# Altium PCB SLRC_2019_Robot_PCB_Main.PcbDoc
Units mil, origin at the board's own origin, x right, y up, seen from the top; angles counter-clockwise.
Board outline 7086.61 x 7086.61 mil, 2 copper layers (Top Layer, Bottom Layer); 32 components, 74 nets, 247 pads, 65 vias.
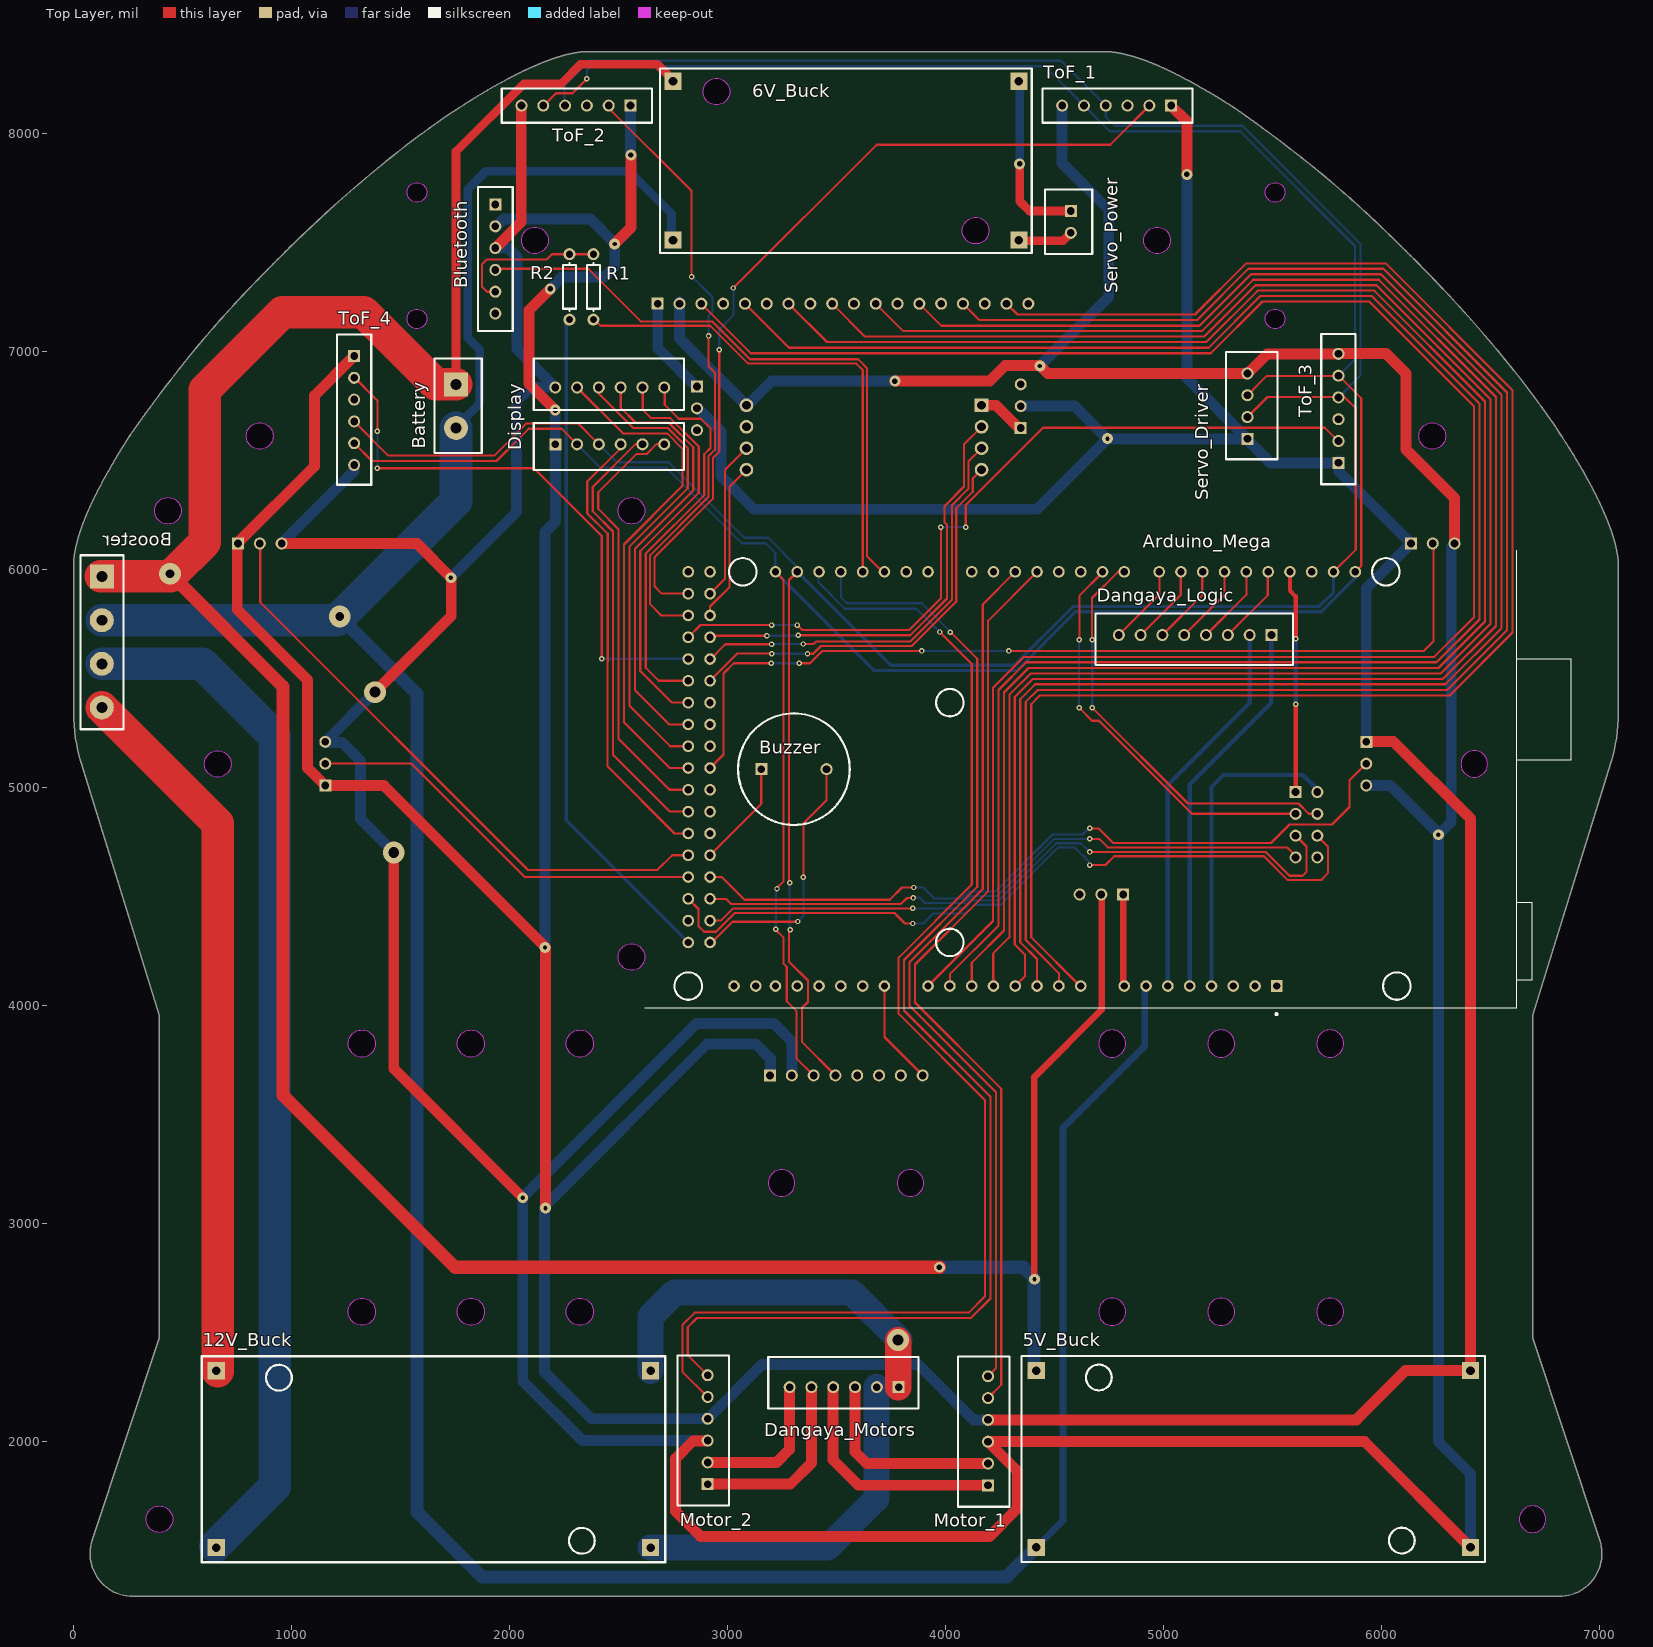
[diagram p0: Top Layer view]
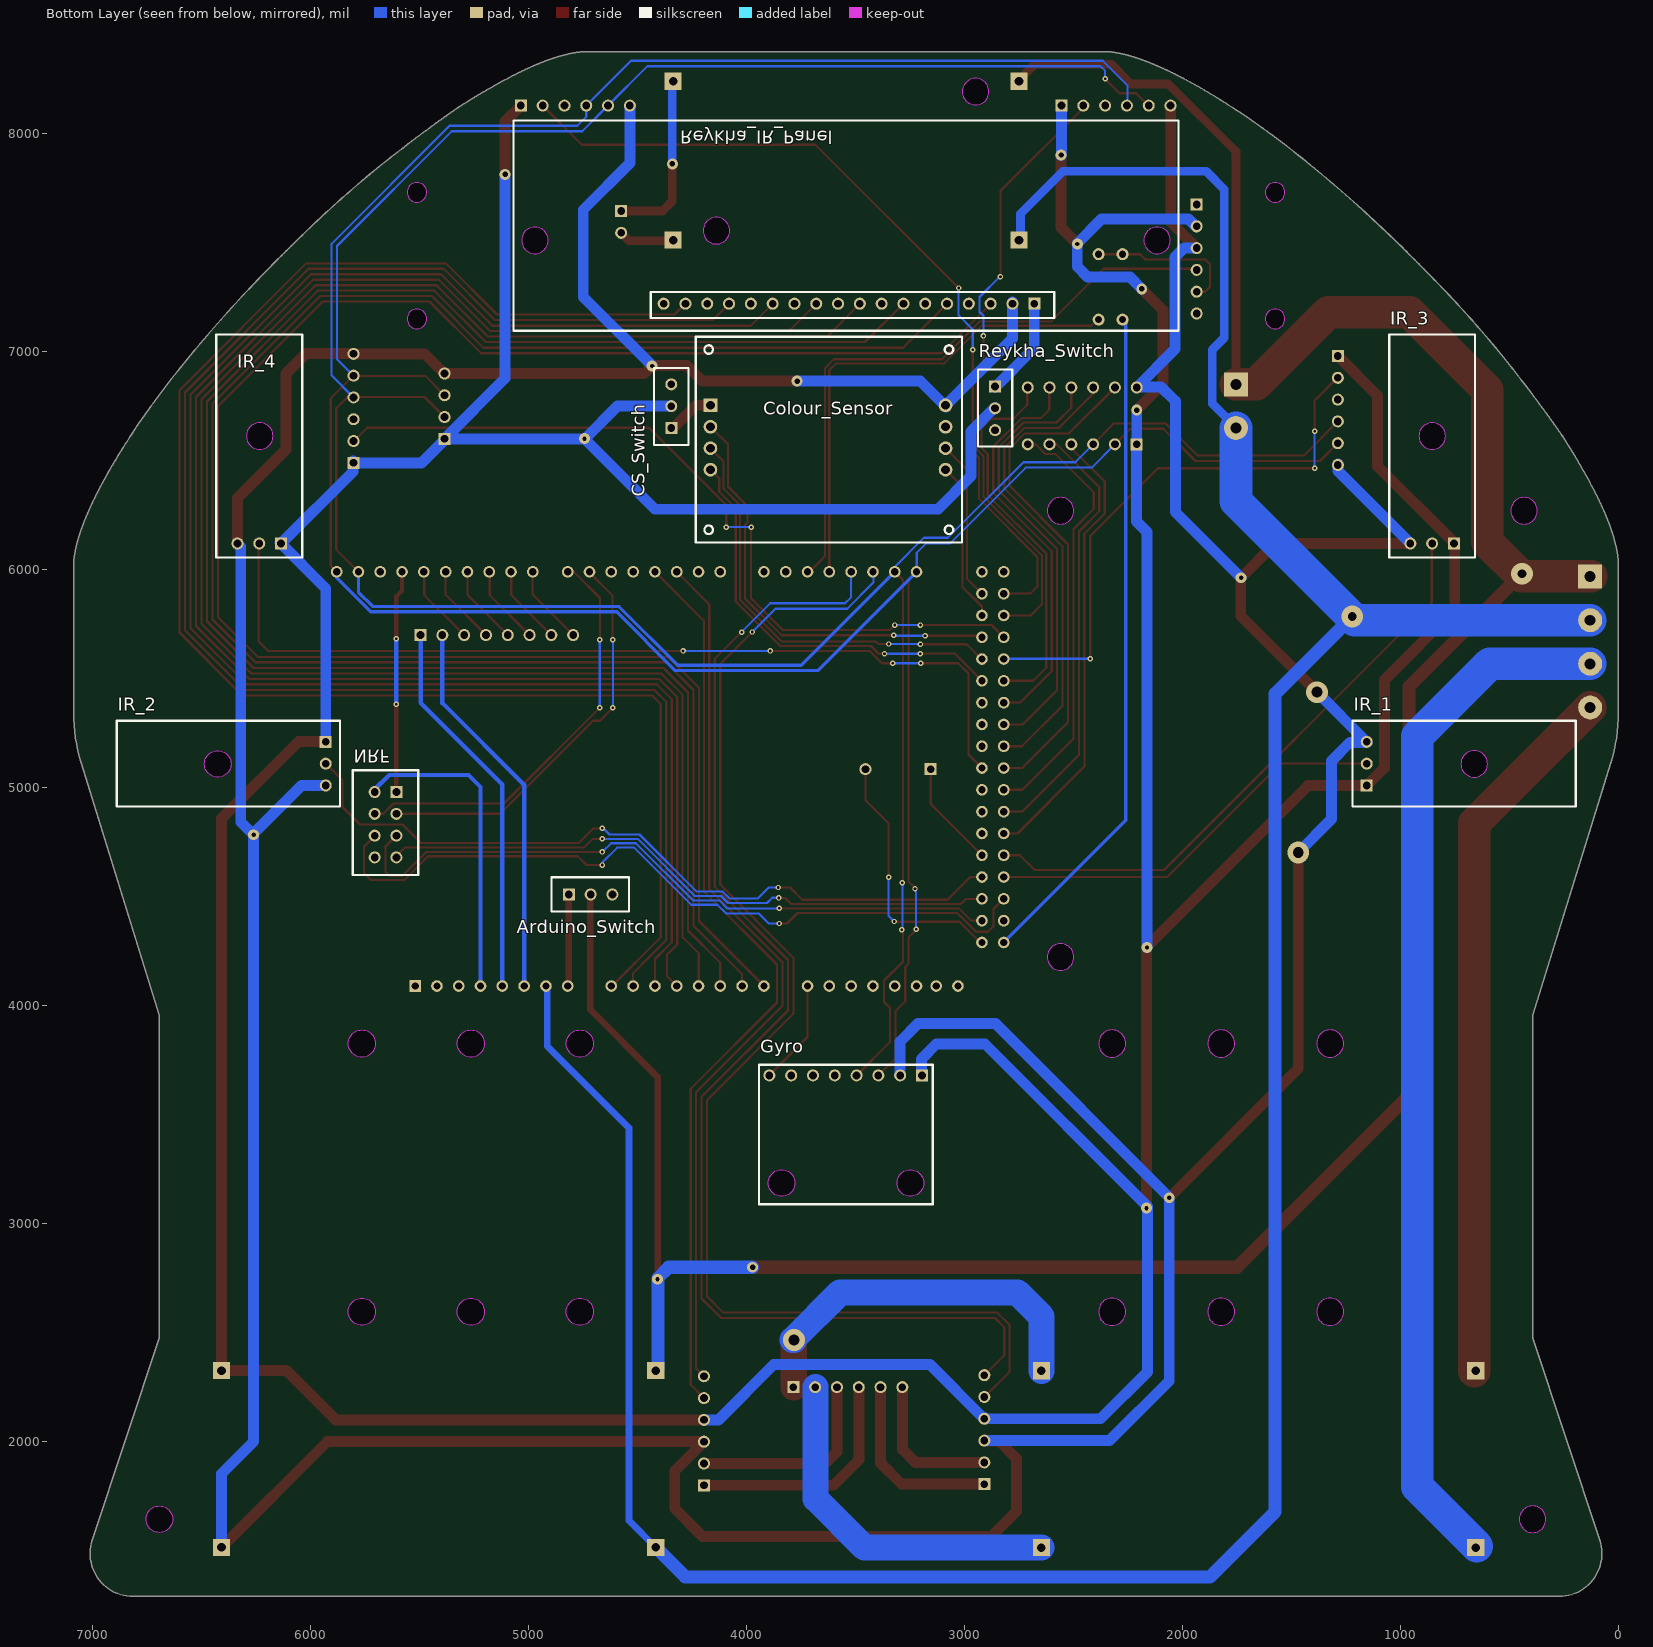
[diagram p1: Bottom Layer view, seen from below]

## Layer stack, top to bottom
Top Solder: solder mask 0.4, Solder Resist, Dk 3.5
Top Layer: signal copper 1.4
Dielectric 1: dielectric 12.6, FR-4, Dk 4.8
Bottom Layer: signal copper 1.4
Bottom Solder: solder mask 0.4, Solder Resist, Dk 3.5

## Board outline
1087 vertices, not listed, extent 0.25,1290 7086.86,8376.61
cut-out: 4702.02,2596.1 ccw(c4764.52,2596.1) 4764.52,2533.6 ccw(c4764.52,2596.1) 4827.02,2596.1 ccw(c4764.52,2596.1) 4764.52,2658.6 ccw(c4764.52,2596.1)
cut-out: 2948.87,8131.78 cw(c2948.87,8192.8) 2887.85,8192.8 cw(c2948.87,8192.8) 2948.87,8253.82 cw(c2948.87,8192.8) 3009.9,8192.8 cw(c2948.87,8192.8)
cut-out: 1575.05,7685.51 cw(c1575.05,7730.51) 1530.05,7730.51 cw(c1575.05,7730.51) 1575.05,7775.51 cw(c1575.05,7730.51) 1620.05,7730.51 cw(c1575.05,7730.51)
cut-out: 1575.05,7105.51 cw(c1575.05,7150.51) 1530.05,7150.51 cw(c1575.05,7150.51) 1575.05,7195.51 cw(c1575.05,7150.51) 1620.05,7150.51 cw(c1575.05,7150.51)
cut-out: 2116.39,7449.45 cw(c2116.39,7510.47) 2055.37,7510.47 cw(c2116.39,7510.47) 2116.39,7571.5 cw(c2116.39,7510.47) 2177.42,7510.47 cw(c2116.39,7510.47)
cut-out: 4138.04,7493.99 cw(c4138.04,7555.01) 4077.01,7555.01 cw(c4138.04,7555.01) 4138.04,7616.03 cw(c4138.04,7555.01) 4199.06,7555.01 cw(c4138.04,7555.01)
cut-out: 5512.06,7105.51 cw(c5512.06,7150.51) 5467.06,7150.51 cw(c5512.06,7150.51) 5512.06,7195.51 cw(c5512.06,7150.51) 5557.06,7150.51 cw(c5512.06,7150.51)
cut-out: 5512.06,7685.51 cw(c5512.06,7730.51) 5467.06,7730.51 cw(c5512.06,7730.51) 5512.06,7775.51 cw(c5512.06,7730.51) 5557.06,7730.51 cw(c5512.06,7730.51)
cut-out: 4970.72,7449.45 cw(c4970.72,7510.47) 4909.7,7510.47 cw(c4970.72,7510.47) 4970.72,7571.5 cw(c4970.72,7510.47) 5031.75,7510.47 cw(c4970.72,7510.47)
cut-out: 6232.53,6551.81 cw(c6232.53,6612.83) 6171.51,6612.83 cw(c6232.53,6612.83) 6232.53,6673.86 cw(c6232.53,6612.83) 6293.56,6612.83 cw(c6232.53,6612.83)
cut-out: 6364.42,5108.9 ccw(c6425.45,5108.9) 6425.45,5047.87 ccw(c6425.45,5108.9) 6486.47,5108.9 ccw(c6425.45,5108.9) 6425.45,5169.92 ccw(c6425.45,5108.9)
cut-out: 6632.14,1644.33 ccw(c6693.16,1644.33) 6693.16,1583.31 ccw(c6693.16,1644.33) 6754.19,1644.33 ccw(c6693.16,1644.33) 6693.16,1705.35 ccw(c6693.16,1644.33)
cut-out: 5702.02,2596.1 ccw(c5764.52,2596.1) 5764.52,2533.6 ccw(c5764.52,2596.1) 5827.02,2596.1 ccw(c5764.52,2596.1) 5764.52,2658.6 ccw(c5764.52,2596.1)
cut-out: 5202.02,2596.1 ccw(c5264.52,2596.1) 5264.52,2533.6 ccw(c5264.52,2596.1) 5327.02,2596.1 ccw(c5264.52,2596.1) 5264.52,2658.6 ccw(c5264.52,2596.1)
cut-out: 5702.02,3826.1 ccw(c5764.52,3826.1) 5764.52,3763.6 ccw(c5764.52,3826.1) 5827.02,3826.1 ccw(c5764.52,3826.1) 5764.52,3888.6 ccw(c5764.52,3826.1)
cut-out: 5202.02,3826.1 ccw(c5264.52,3826.1) 5264.52,3763.6 ccw(c5264.52,3826.1) 5327.02,3826.1 ccw(c5264.52,3826.1) 5264.52,3888.6 ccw(c5264.52,3826.1)
cut-out: 4702.02,3826.1 ccw(c4764.52,3826.1) 4764.52,3763.6 ccw(c4764.52,3826.1) 4827.02,3826.1 ccw(c4764.52,3826.1) 4764.52,3888.6 ccw(c4764.52,3826.1)
cut-out: 2559.31,6209.29 cw(c2559.31,6270.31) 2498.28,6270.31 cw(c2559.31,6270.31) 2559.31,6331.34 cw(c2559.31,6270.31) 2620.33,6270.31 cw(c2559.31,6270.31)
cut-out: 854.58,6551.81 cw(c854.58,6612.83) 793.56,6612.83 cw(c854.58,6612.83) 854.58,6673.86 cw(c854.58,6612.83) 915.6,6612.83 cw(c854.58,6612.83)
cut-out: 433.32,6209.29 cw(c433.32,6270.31) 372.3,6270.31 cw(c433.32,6270.31) 433.32,6331.34 cw(c433.32,6270.31) 494.34,6270.31 cw(c433.32,6270.31)
cut-out: 661.67,5047.87 cw(c661.67,5108.9) 600.64,5108.9 cw(c661.67,5108.9) 661.67,5169.92 cw(c661.67,5108.9) 722.69,5108.9 cw(c661.67,5108.9)
cut-out: 2559.31,4162.05 cw(c2559.31,4223.07) 2498.28,4223.07 cw(c2559.31,4223.07) 2559.31,4284.09 cw(c2559.31,4223.07) 2620.33,4223.07 cw(c2559.31,4223.07)
cut-out: 1322.59,3763.6 cw(c1322.59,3826.1) 1260.09,3826.1 cw(c1322.59,3826.1) 1322.59,3888.6 cw(c1322.59,3826.1) 1385.09,3826.1 cw(c1322.59,3826.1)
cut-out: 1822.59,3763.6 cw(c1822.59,3826.1) 1760.09,3826.1 cw(c1822.59,3826.1) 1822.59,3888.6 cw(c1822.59,3826.1) 1885.09,3826.1 cw(c1822.59,3826.1)
cut-out: 2322.59,3763.6 cw(c2322.59,3826.1) 2260.09,3826.1 cw(c2322.59,3826.1) 2322.59,3888.6 cw(c2322.59,3826.1) 2385.09,3826.1 cw(c2322.59,3826.1)
cut-out: 3777.81,3186.65 ccw(c3838.83,3186.65) 3838.83,3125.63 ccw(c3838.83,3186.65) 3899.86,3186.65 ccw(c3838.83,3186.65) 3838.83,3247.68 ccw(c3838.83,3186.65)
cut-out: 3187.26,3186.65 ccw(c3248.28,3186.65) 3248.28,3125.63 ccw(c3248.28,3186.65) 3309.31,3186.65 ccw(c3248.28,3186.65) 3248.28,3247.68 ccw(c3248.28,3186.65)
cut-out: 2322.59,2533.6 cw(c2322.59,2596.1) 2260.09,2596.1 cw(c2322.59,2596.1) 2322.59,2658.6 cw(c2322.59,2596.1) 2385.09,2596.1 cw(c2322.59,2596.1)
cut-out: 1822.59,2533.6 cw(c1822.59,2596.1) 1760.09,2596.1 cw(c1822.59,2596.1) 1822.59,2658.6 cw(c1822.59,2596.1) 1885.09,2596.1 cw(c1822.59,2596.1)
cut-out: 1322.59,2533.6 cw(c1322.59,2596.1) 1260.09,2596.1 cw(c1322.59,2596.1) 1322.59,2658.6 cw(c1322.59,2596.1) 1385.09,2596.1 cw(c1322.59,2596.1)
cut-out: 393.95,1583.31 cw(c393.95,1644.33) 332.93,1644.33 cw(c393.95,1644.33) 393.95,1705.35 cw(c393.95,1644.33) 454.97,1644.33 cw(c393.95,1644.33)

## Design rules (kind name [scope] priority, off if disabled: settings)
BoardOutlineClearance [All] p1: gap=10 ignorepadtopadclearanceinfootprint=FALSE
Clearance CopperRule [InNamedPolygon('BATTERY_-_L02_P010')] p1: gap=20 ignorepadtopadclearanceinfootprint=FALSE
Clearance Clearance_2 [InNamedPolygon('BATTERY_-_L02_P004')] p2: gap=10 ignorepadtopadclearanceinfootprint=FALSE except(0: Arc-Hole Track-Hole SMDPad-Hole THPad-Hole Via-Hole Fill-Hole Poly-Hole Region-Hole Text-Hole)
Clearance Clearance_1 [InNamedPolygon('BATTERY_-_L02_P004')] p3: gap=10 ignorepadtopadclearanceinfootprint=FALSE except(0: Arc-Hole Track-Hole SMDPad-Hole THPad-Hole Via-Hole Fill-Hole Poly-Hole Region-Hole Text-Hole)
Clearance [All] p4: gap=10 ignorepadtopadclearanceinfootprint=FALSE
DiffPairsRouting [All] p1: maxlimit=10 minlimit=10 mostfreqgap=10 toplayer_minwidth=15 toplayer_maxwidth=15 toplayer_prefwidth=15 bottomlayer_minwidth=15 bottomlayer_maxwidth=15 bottomlayer_prefwidth=15 maxuncoupledlength=500
HoleSize [All] p1: absolutevalues=TRUE maxlimit=100 minlimit=10 maxpercent=80.000 minpercent=20.000
MinimumAnnularRing [All] p1: minimumring=3
PolygonConnect [All] p1: connectstyle=Relief reliefconductorwidth=10 reliefentries=4 polygonreliefangle="90 Angle" airgapwidth=10
RoutingVias [All] p1: holewidth=25 width=50 viastyle="Through Hole" minholewidth=10 minwidth=20 maxholewidth=50 maxwidth=100
SilkToSolderMaskClearance [IsPad] p1: minsilkscreentomaskgap=8 clearancetoexposedcopper=TRUE
SolderMaskExpansion [All] p1: expansion=4
Width [All] p1: maxlimit=150 minlimit=10 preferedwidth=30
27 further rules are at their usual default settings.

## Classes and differential pairs
differential pair Motor_2_Enc: +Motor_2_Enc_P -Motor_2_Enc_N
differential pair Motor_1_Enc: +Motor_1_Enc_P -Motor_1_Enc_N
differential pair SCL_SDA: +SCL_SDA_P -SCL_SDA_N
differential pair Raykha_S78: +Raykha_S78_P -Raykha_S78_N
differential pair Raykha_S56: +Raykha_S56_P -Raykha_S56_N
differential pair Raykha_S34: +Raykha_S34_P -Raykha_S34_N
differential pair Raykha_S12: +Raykha_S12_P -Raykha_S12_N

## Components (designator, comment, footprint, x,y, rotation, side; value= is the part's Value field where it differs from the comment)
5V_Buck "Buck_XL4015" Buck_LM4015 4349.07,2392.93 r0 top locked
6V_Buck "Buck_LM2596" Buck_LM2596 2690.94,8299.06 r0 top locked
12V_Buck "Buck_XL4015" Buck_LM4015 588.07,2391.93 r0 top locked
Arduino_Mega "ARDUINO_MEGA2560_REV3_-_RETAIL" *ARDUINO_MEGA2560_REV3_-_RETAIL_ARDUINO_MEGA2560_REV3_-_RETAIL(Primary) 4620,5040 r90 top locked
Arduino_Switch "Switch" Switch 4815,4510 r180 bottom locked
Battery "Battery_Connector" Battery_Connector 1755,6850 r90 top locked
Bluetooth "Bluetooth_Module_HC-05" Bluetooth_Module_HC-05 1935,7675 r90 top locked
Booster "DC_DC_Boost_Converter" DC_DC_Boost_Converter 130,5968 r0 top
Buzzer "Buzzer" Buzzer 3155,5085 r180 top locked
Colour_Sensor "Colour_Sensor_TCS3200" Colour_Sensor_TCS3200 4232.48,7068.7 r180 bottom locked
CS_Switch "Switch" Switch 4345,6650 r90 bottom locked (schematic designator Colour_Sensor_Switch)
Dangaya_Logic "Dangaya_Logic_JST" Dangaya_Logic_JST 5495,5700 r270 top locked
Dangaya_Motors "Dangaya_Motors_JST" Dangaya_Motors_JST 3285,2250 r90 top locked
Display "Button_Panel_LED_and_OLED" Button_Panel_LED_and_OLED 2210,6575 r180 top locked
Gyro "Gyro_MPU6050" Gyro_MPU6050 3195,3680 r180 bottom locked
IR_1 "Single_Line_Sensor_TCRT5000" Single_Line_Sensor_TCRT5000 196.34,4913.15 r0 bottom locked
IR_2 "Single_Line_Sensor_TCRT5000" Single_Line_Sensor_TCRT5000 6888.66,5306.85 r180 bottom locked
IR_3 "Single_Line_Sensor_TCRT5000" Single_Line_Sensor_TCRT5000 658.15,7078.66 r270 bottom locked
IR_4 "Single_Line_Sensor_TCRT5000" Single_Line_Sensor_TCRT5000 6038.15,7078.66 r270 bottom locked
Motor_1 "Pololu_Gear_Motor" Pololu_Gear_Motor 4195,1800 r180 top locked
Motor_2 "Pololu_Gear_Motor" Pololu_Gear_Motor 2909,1805 r180 top locked
NRF "NRF_24L01_Module" NRF_24L01 5605.75,4980 r0 bottom locked
R1 "Res1" AXIAL-0.3 2385,7297 r270 top locked value=1K
R2 "Res1" AXIAL-0.3 2275,7297 r90 top locked value=1K
Reykha_IR_Panel "Reykha_IR_Panel" Reykha_IR_Panel 5068.98,8060.55 r180 bottom locked
Reykha_Switch "Switch" Switch 2860,6840 r270 bottom locked
Servo_Driver "Servo_Driver" Servo_Driver 5385,6900 r270 top locked
Servo_Power "Servo_Power" Servo_Power 4575,7645 r90 top locked
ToF_1 "ToF_VL53L0" ToF_VL53L0 5035,8128.74 r180 top locked
ToF_2 "ToF_VL53L0" ToF_VL53L0 2555,8128.74 r180 top locked
ToF_3 "ToF_VL53L0" ToF_VL53L0 5802.52,6490 r90 top locked
ToF_4 "ToF_VL53L0" ToF_VL53L0 1287.48,6980 r270 top locked

## Footprints (in the part's own frame and the unit in brackets; to place one, negate y for a bottom-side part, rotate by r counter-clockwise, add the part's x,y. Pads: shape width x height; smd on the part's side, far side on the other; paste and mask are expansions set on the pad)
*ARDUINO_MEGA2560_REV3_-_RETAIL_ARDUINO_MEGA2560_REV3_-_RETAIL(Primary) [mm]
  round 1.358 hole 0.85: 0(24.13,12.7) 1(24.13,10.16) 2(24.13,7.62) 3(24.13,5.08) 3V3(-24.13,-15.24) 4(24.13,2.54) 5(24.13,0) 5V_1(-24.13,-12.7) 5V_2(24.13,43.18) 5V_3(24.13,45.72) 6(24.13,-2.54) 7(24.13,-5.08) 8(24.13,-9.144) 9(24.13,-11.684) 10(24.13,-14.224) 11(24.13,-16.764) 12(24.13,-19.304) 13(24.13,-21.844) 14(24.13,17.78) 15(24.13,20.32) 16(24.13,22.86) 17(24.13,25.4) 18(24.13,27.94) 19(24.13,30.48) 20(24.13,33.02) 21(24.13,35.56) 22(21.59,43.18) 23(21.59,45.72) 24(19.05,43.18) 25(19.05,45.72) 26(16.51,43.18) 27(16.51,45.72) 28(13.97,43.18) 29(13.97,45.72) 30(11.43,43.18) 31(11.43,45.72) 32(8.89,43.18) 33(8.89,45.72) 34(6.35,43.18) 35(6.35,45.72) 36(3.81,43.18) 37(3.81,45.72) 38(1.27,43.18) 39(1.27,45.72) 40(-1.27,43.18) 41(-1.27,45.72) 42(-3.81,43.18) 43(-3.81,45.72) 44(-6.35,43.18) 45(-6.35,45.72) 46(-8.89,43.18) 47(-8.89,45.72) 48(-11.43,43.18) 49(-11.43,45.72) 50(-13.97,43.18) 51(-13.97,45.72) 52(-16.51,43.18) 53(-16.51,45.72) AD0(-24.13,0) AD1(-24.13,2.54) AD2(-24.13,5.08) AD3(-24.13,7.62) AD4(-24.13,10.16) AD5(-24.13,12.7) AD6(-24.13,15.24) AD7(-24.13,17.78) AD8(-24.13,22.86) AD9(-24.13,25.4) AD10(-24.13,27.94) AD11(-24.13,30.48) AD12(-24.13,33.02) AD13(-24.13,35.56) AD14(-24.13,37.846) AD15(-24.13,40.386) AREF(24.13,-26.924) GND1(-24.13,-10.16) GND2(-24.13,-7.62) GND3(24.13,-24.384) GND4(-19.05,43.18) GND5(-19.05,45.72) IOREF(-24.13,-20.32) RESET(-24.13,-17.78) SCL(24.13,-32.004) SDA(24.13,-29.464) VIN(-24.13,-5.08)
  rect 1.358x1.358 hole 0.85: NC(-24.13,-22.86)
  silkscreen extent -27.52,-57.15 26.67,50.8
AXIAL-0.3 [mm] "Axial Device, Thru-Hole; 2 Leads; 0.3 in Pin Spacing"
  round 1.4 hole 0.85: 1(-3.81,0) 2(3.81,0)
  silkscreen extent -2.77,-0.76 2.77,0.76
Battery_Connector [mil]
  rect 110x110 hole 50: 1(0,0)
  round 110 hole 50: 2(-200,0)
  silkscreen extent -315,-118 118,98
Bluetooth_Module_HC-05 [mm]
  rect 1.4x1.4 hole 0.9: 1(0,0)
  round 1.4 hole 0.9: 2(-2.54,0) 3(-5.08,0) 4(-7.62,0) 5(-10.16,0) 6(-12.7,0)
  silkscreen extent -14.73,-2.03 2.03,2.03
Buck_LM2596 [mm]
  rect 2x2 hole 1: 1(1.5,-1.5) 2(1.5,-20) 3(41.8,-1.5) 4(41.8,-20)
  silkscreen extent 0,-21.5 43.3,0
Buck_LM4015 [mm]
  rect 2x2 hole 1: 1(1.7,-1.7) 2(1.7,-22.3) 3(52.3,-1.7) 4(52.3,-22.3)
  silkscreen extent 0,-24 54,0
Button_Panel_LED_and_OLED [mm]
  rect 1.4x1.4 hole 0.9: 1(0,0)
  round 1.4 hole 0.9: 2(-2.54,0) 3(-5.08,0) 4(-7.62,0) 5(-10.16,0) 6(-12.7,0) 7(-12.7,-6.62) 8(-10.16,-6.62) 9(-7.62,-6.62) 10(-5.08,-6.62) 11(-2.54,-6.62) 12(0,-6.62)
  silkscreen extent -15,-10 2.5,3
Buzzer [mm]
  rect 1.4x1.4 hole 0.9: 1(0,0)
  round 1.4 hole 0.9: 2(-7.6,0)
  silkscreen extent -10.3,-6.5 2.7,6.5
Colour_Sensor_TCS3200 [mm]
  rect 1.6x1.6 hole 1.02: 1(1.7,-8)
  round 1.6 hole 1.02: 2(1.7,-10.5) 3(1.7,-13) 4(1.7,-15.5) 5(29.1,-8) 6(29.1,-10.5) 7(29.1,-13) 8(29.1,-15.5)
  silkscreen extent 0,-24 31,0
Dangaya_Logic_JST [mm]
  rect 1.4x1.4 hole 0.9: 1(0,0)
  round 1.4 hole 0.9: 2(0,-2.54) 3(0,-5.08) 4(0,-7.62) 5(0,-10.16) 6(0,-12.7) 7(0,-15.24) 8(0,-17.78)
  silkscreen extent -2.5,-20.5 3.5,2.5
Dangaya_Motors_JST [mm]
  round 1.4 hole 0.9: 1(0,0) 2(0,-2.54) 3(0,-5.08) 4(0,-7.62) 5(0,-10.16)
  rect 1.4x1.4 hole 0.9: 6(0,-12.7)
  silkscreen extent -2.5,-15 3.5,2.5
DC_DC_Boost_Converter [mil]
  rect 110x110 hole 50: 1(0,0)
  round 110 hole 50: 2(0,-200) 3(0,-400) 4(0,-600)
  silkscreen extent -98,-700 100,98
Gyro_MPU6050 [mm]
  rect 1.4x1.4 hole 0.9: 1(0,0)
  round 1.4 hole 0.9: 2(-2.54,0) 3(-5.08,0) 4(-7.62,0) 5(-10.16,0) 6(-12.7,0) 7(-15.24,0) 8(-17.78,0)
  silkscreen extent -19,-15 1.25,1.25
NRF_24L01 [mm]
  rect 1.4x1.4 hole 0.9: 1(0,0)
  round 1.4 hole 0.9: 2(2.54,0) 3(0,2.54) 4(2.54,2.54) 5(0,5.08) 6(2.54,5.08) 7(0,7.62) 8(2.54,7.62)
  silkscreen extent -2.54,-2.54 5.08,9.65
Pololu_Gear_Motor [mm]
  rect 1.4x1.4 hole 0.9: 1(0,0)
  round 1.4 hole 0.9: 2(0,-2.54) 3(0,-5.08) 4(0,-7.62) 5(0,-10.16) 6(0,-12.7)
  silkscreen extent -2.5,-15 3.5,2.5
Reykha_IR_Panel [mm]
  rect 1.4x1.4 hole 0.9: 1(60.68,-21.35)
  round 1.4 hole 0.9: 2(58.14,-21.35) 3(55.6,-21.35) 4(53.06,-21.35) 5(50.52,-21.35) 6(47.98,-21.35) 7(45.44,-21.35) 8(42.9,-21.35) 9(40.36,-21.35) 10(37.82,-21.35) 11(35.28,-21.35) 12(32.74,-21.35) 13(30.2,-21.35) 14(27.66,-21.35) 15(25.12,-21.35) 16(22.58,-21.35) 17(20.04,-21.35) 18(17.5,-21.35)
  silkscreen extent 0,-24.5 77.5,0
Servo_Driver [mm]
  round 1.4 hole 0.9: 1(0,0) 2(2.54,0) 3(5.08,0)
  rect 1.4x1.4 hole 0.9: 4(7.62,0)
  silkscreen extent -2.5,-2.5 10,3.5
Servo_Power [mm]
  rect 1.4x1.4 hole 0.9: 1(0,0)
  round 1.4 hole 0.9: 2(-2.54,0)
  silkscreen extent -5,-2.5 2.5,3
Single_Line_Sensor_TCRT5000 [mm]
  rect 1.4x1.4 hole 0.9: 1(24.35,-2.46)
  round 1.4 hole 0.9: 2(24.35,-5) 3(24.35,-7.54)
  silkscreen extent 0,-10 26,0
Switch [mm]
  rect 1.4x1.4 hole 0.9: 1(0,0)
  round 1.4 hole 0.9: 2(2.54,0) 3(5.08,0)
  silkscreen extent -2,-2 7,2
ToF_VL53L0 [mm]
  rect 1.4x1.4 hole 0.9: 1(0,0)
  round 1.4 hole 0.9: 2(2.54,0) 3(5.08,0) 4(7.62,0) 5(10.16,0) 6(12.7,0)
  silkscreen extent -2.5,-2 15,2

## Part data
Arduino_Mega: "Dev.kit: Arduino; SPI, TWI, UART; ICSP, USB B, pin strips, supply", Package=None, Availability=Unavailable, MF=Arduino, MP="ARDUINO MEGA2560 REV3 - RETAIL", Price=None, SnapEDA_Link=https://www.snapeda.com/parts/ARDUINO%20MEGA2560%20REV3%20-%20RETAIL/Arduino/view-part/?ref=snap
R1 R2: "Resistor", LatestRevisionDate=17-Jul-2002, LatestRevisionNote="Re-released for DXP Platform.", PackageDescription="Axial Device, Thru-Hole; 2 Leads; 0.3 in Pin Spacing", PackageReference=AXIAL-0.3, Published=8-Jun-2000, Publisher="Altium Limited"

## Via types
v1: diameter 25, hole 12, Top Layer to Bottom Layer, 44 vias
v2: diameter 50, hole 20, Top Layer to Bottom Layer, 9 vias
v3: diameter 50, hole 25, Top Layer to Bottom Layer, 7 vias
v4: diameter 100, hole 50, Top Layer to Bottom Layer, 3 vias
v5: diameter 100, hole 40, Top Layer to Bottom Layer, 2 vias

## Nets (pads, with @x,y where several pads share a name; then routed paths per layer and width w, separated by ;. In a path a pad name is that pad's centre, name@x,y a point inside that pad or via, vN(x,y) a via of type N, cw(c..) or ccw(c..) an arc to the next point about the centre after c; other vN are vias at no path point)
Arduino_5V_Out: Arduino_Mega.5V_1 Dangaya_Logic.1 | length 1765.3
  Bottom Layer w20: Arduino_Mega.5V_1 5120,5015 5495,5390 Dangaya_Logic.1
Arduino_GND_Out: Arduino_Mega.GND1 Dangaya_Logic.2 | length 1768.3
  Bottom Layer w10: Arduino_Mega.GND1@5020,4087 Arduino_Mega.GND1
  Bottom Layer w20: Arduino_Mega.GND1 5020,5013 5395,5388 Dangaya_Logic.2
Arduino_GND_Out4: Arduino_Mega.GND4 Buzzer.2 | length 1184
  Top Layer w10: Arduino_Mega.GND4 2928,4290 3023,4385 v1@3323,4385 ; v1(3348,4589) 3348,4836 3454,4942 3454,5072 Buzzer.2@3455,5073
  Bottom Layer w10: v1(3323,4386) 3348,4411 v1(3348,4589)
Arduino_GND_Out5: Arduino_Mega.GND5 R2.1 | length 3096.2
  Bottom Layer w15: R2.1@2275,7148 2260,7133 2260,4850 Arduino_Mega.GND5
Arduino_V_In: Arduino_Mega.VIN Arduino_Switch.1 | length 420.7
  Top Layer w30: Arduino_Switch.1 4815,4095 Arduino_Mega.VIN@4819,4091
Battery_+: 5V_Buck.1 6V_Buck.1 Arduino_Switch.2 Battery.1 Booster.1 | length 15252.8
  Top Layer w30: v2(4408,2745) 4408,3673 4716,3981 ; 4716,3981 4716,4513 4716,3981
  Top Layer w40: Battery.1 1755,7918 2065,8228 2236,8228 2326,8318 2678,8318 ; 2678,8318 2756,8240 2678,8318
  Top Layer w60: v5(443,5981) 450,5974 961,5463 961,3589 1750,2800 v3(3972,2800)
  Top Layer w150: Battery.1 1662,6850 1331,7181 959,7181 602,6824 602,6126 ; v5@446,5970 126,5970 v5@446,5970 ; v5@446,5970 v5@450,5974 ; v5@446,5970 v5@450,5974 ; v5@450,5974 602,6126 ; v5@450,5974 602,6126
  Bottom Layer w60: v3(3972,2800) 4357,2800 v2@4406,2751 ; v2@4406,2751 4406,2335 v2@4406,2751
Battery_-: 5V_Buck.2 6V_Buck.2 Arduino_Mega.GND2 Battery.2 Booster.2 | length 15814.5
  Bottom Layer w30: 5V_Buck.2 4539,1637.98 4539,3439 4913,3813 ; 4913,3813 4913,4093 4913,3813
  Bottom Layer w40: Battery.2@1755,6653.15 1864,6762.15 1864,7008 1808,7064 1808,7744 1891,7827 2548,7827 2743,7632 6V_Buck.2@2743,7515
  Bottom Layer w60: v5(1221,5785) 1223.5,5782.5 1575,5431 1575,1678 1873,1380 4281,1380 ; 4281,1380 5V_Buck.2 4281,1380
  Bottom Layer w150: Booster.2 v5@1209,5768 ; Battery.2 1755,6314 ; v5@1209,5768 v5@1223.5,5782.5 ; v5@1209,5768 v5@1223.5,5782.5 ; v5@1223.5,5782.5 1755,6314 ; v5@1223.5,5782.5 1755,6314
Bluetooth_Rx: Arduino_Mega.16 Bluetooth.4 | length 5038.5
  Top Layer w10: Arduino_Mega.16 3711,5990 3640,6061 3640,6924.28 3599.28,6965 3103.18,6965 2929.18,7139 2602,7139 2361,7380 ; Bluetooth.4@1928,7380 Bluetooth.4@1935,7380 ; Bluetooth.4@1928,7380 Bluetooth.4@1935,7380 ; Bluetooth.4@1928,7380 Bluetooth.4@1935,7380 ; Bluetooth.4@1928,7380 2361,7380 ; Bluetooth.4@1928,7380 2361,7380 ; Bluetooth.4@1928,7380 Bluetooth.4@1935,7380 ; Bluetooth.4@1935,7380 2361,7380 ; Bluetooth.4@1935,7380 2361,7380 ; Bluetooth.4@1935,7380 2361,7380 ; Bluetooth.4@1935,7380 2361,7380
Bluetooth_Tx: Arduino_Mega.17 R1.2 | length 2483.6
  Top Layer w10: Arduino_Mega.17 3620,6916 3591,6945 3094.9,6945 2920.9,7119 2418,7119 ; R1.2@2386,7151 2418,7119 ; R1.2@2386,7151 2418,7119 ; R1.2@2386,7151 R1.2@2387.5,7149.5 ; R1.2@2386,7151 R1.2@2387.5,7149.5 ; R1.2@2386,7151 R1.2@2387.5,7149.5 ; R1.2@2386,7151 R1.2@2387.5,7149.5 ; R1.2@2387.5,7149.5 2418,7119 ; R1.2@2387.5,7149.5 2418,7119 ; R1.2@2387.5,7149.5 2418,7119 ; R1.2@2387.5,7149.5 2418,7119
Buck_5V_Out_GND: 5V_Buck.4 Bluetooth.3 Colour_Sensor.5 Display.12 Gyro.2 IR_1.3 IR_2.3 IR_3.3 IR_4.3 Motor_1.3 Motor_2.3 Reykha_IR_Panel.2 Servo_Driver.1 ToF_1.6 ToF_2.6 ToF_3.6 ToF_4.6 | length 27114.4
  Top Layer w10: ToF_3.6@5802.52,6988 ToF_3.6@5805,6988
  Top Layer w50: IR_3.3@952,6120 IR_3.3 1575,6120 1733,5962 1733,5788 v4(1383,5438) ; v4(1469,4703) 1469,3711 v2(2061,3119) ; Bluetooth.3 2054,7594 ToF_2.6@2054,8132 ; Motor_2.3@2908,2004 2843,2004 2761,1922 2761,1681 2877,1565 4201,1565 4329,1693 4329,1866 Motor_1.3 5923.1,2000 5V_Buck.4 ; v3(3768,6865) 4203,6865 4274,6936 4433,6936 4469,6900 Servo_Driver.1 ; Servo_Driver.1@5384,6898 5476,6990 ToF_3.6 ; ToF_3.6@5802,6992 6020,6992 6113,6899 6113,6551 6335,6329 IR_4.3
  Bottom Layer w50: IR_3.3 1287,6452 ToF_4.6@1287,6484 ; IR_1.3@1153,5208 1231,5208 1316,5123 1316,4856 v4(1469,4703) ; IR_1.3 v4(1383,5438) ; v2(1731,5963) 2033,6265 2033,6773 2098,6838 Display.12@2207,6838 ; Bluetooth.3@1936,7475 1993,7475 2034,7434 2034,7011.63 Display.12 ; Reykha_IR_Panel.2@2780,7227 Reykha_IR_Panel.2 2780,7060.55 Colour_Sensor.5 ; Motor_2.3 2334.58,2005 2061,2278.58 v2(2061,3119) 2061,3120.42 2858.29,3917.71 3213.71,3917.71 3295,3836.42 Gyro.2 ; Colour_Sensor.5@3084,6746 3203,6865 v3(3768,6865) ; v2@4434,6936 4749,7251 4749,7651 4535,7865 ToF_1.6 ; IR_2.3@5932,5010 6041,5010 6261,4790 v2(6261,4784) ; IR_4.3@6336,6121 IR_4.3 6320,6105 6320,4843 v2(6261,4784) ; 5V_Buck.4 6408.13,1852.87 6261,2000 v2(6261,4784)
  other v2: 4433,6934
Buck_5V_Out_Vcc: 5V_Buck.3 Bluetooth.2 CS_Switch.2 Display.1 Gyro.1 IR_1.1 IR_2.1 IR_3.1 IR_4.1 Motor_1.4 Motor_2.4 Reykha_Switch.2 Servo_Driver.4 ToF_1.1 ToF_2.1 ToF_3.1 ToF_4.1 | length 26844.6
  Top Layer w10: ToF_3.1@5802.52,6491 ToF_3.1@5803,6491
  Top Layer w50: IR_3.1@751,6124 751,5817 1074,5494 1074,5091 IR_1.1 ; IR_3.1 755,6124 1105,6474 1105,6798 ToF_4.1@1289,6982 ; IR_1.1@1151,5009 1424,5009 2165,4268 v2(2165,3071) ; v3(2187,7288) 2089,7190 2089,6853 v3(2210,6732) ; v2(2482,7494) 2557,7569 v3(2557,7902) ; Motor_1.4 5885,2100 5895,2110 ; ToF_1.1@5033,8129 5107,8055 v3(5107,7813) ; 5890,2106 6110,2326 5V_Buck.3 6408.13,4857.87 6054,5212 IR_2.1@5926,5212
  Bottom Layer w50: Bluetooth.2@1936,7571 1973,7608 2371,7608 2483,7496 2483,7390 2435,7342 2241,7342 v3(2187,7288) ; v2(2163,4267) 2163,6173 2211,6221 Display.1@2211,6577 ; Display.1 v3(2210,6732) ; ToF_2.1 2555,7902 v3@2558,7899 ; Reykha_Switch.2@2861,6743 2970,6634 2970,6429 3122,6277 4419,6277 v2@4742,6600 ; Motor_2.4@2908,2110 2915,2110 3159,2354 3875,2354 4129,2100 Motor_1.4 ; Motor_2.4 2376,2105 2161,2320 2161,3079 2907,3825 3128,3825 3198,3755 3198,3683 Gyro.1 ; CS_Switch.2 4592,6750 v2@4742,6600 ; v2(4743,6601) v2@4742,6600 ; v3(5107,7813) 5107,6878 Servo_Driver.4 Servo_Driver.4@5380,6600 ; ToF_3.1 5490,6490 Servo_Driver.4@5380,6600 ; ToF_3.1@5804,6498 5804,6451 IR_4.1 ; IR_2.1 5930,5914 IR_4.1@6140,6124 ; v2@4742,6600 Servo_Driver.4@5380,6600
Buck_6V_Out_GND: 6V_Buck.4 Servo_Power.2 | length 862.3
  Top Layer w40: 6V_Buck.4@4336.61,7509 4539,7509 ; Servo_Power.2 4539,7509 ; 6V_Buck.4@4336,7509 4539,7509 ; 6V_Buck.4@4336,7509 4539,7509 ; 6V_Buck.4@4336,7509 4539,7509
Buck_6V_Out_Vcc: 6V_Buck.3 Servo_Power.1 | length 806.3
  Top Layer w40: v3@4339,7863 4340,7862 v3(4340,7861) 4340,7690 4385,7645 Servo_Power.1
  Bottom Layer w40: 6V_Buck.3@4337,8239 4340,8236 v3(4340,7861)
Buck_12V_In_GND: 12V_Buck.2 Booster.3 | length 4758.6
  Bottom Layer w150: Booster.3 591,5568 923,5236 923,1794 12V_Buck.2@650,1521
Buck_12V_In_Vcc: 12V_Buck.1 Booster.4 | length 10802.4
  Top Layer w150: Booster.4 662,4836 ; 12V_Buck.1@662,2325 662,4836 ; 12V_Buck.1@662,2323 662,4836 ; 12V_Buck.1@662,2323 662,4836 ; 12V_Buck.1@662,2323 662,4836
Buck_12V_Out_GND: 12V_Buck.4 Dangaya_Motors.5 | length 2664.7
  Bottom Layer w120: 12V_Buck.4 3458.98,1513.98 3683,1738 ; 3683,1738 Dangaya_Motors.5@3683,2250 ; 3683,1738 Dangaya_Motors.5@3683,2250 ; 3683,1738 Dangaya_Motors.5@3683,2250
Buck_12V_Out_Vcc: 12V_Buck.3 Dangaya_Motors.6 | length 2781.5
  Top Layer w120: v4(3782,2467) 3782,2459 v4@3783,2458 ; Dangaya_Motors.6@3782.56,2248 Dangaya_Motors.6@3783,2248.44 ; Dangaya_Motors.6@3783,2248.44 v4@3783,2458 ; Dangaya_Motors.6@3783,2248.44 v4@3783,2458 ; Dangaya_Motors.6@3783,2248.44 v4@3783,2458
  Bottom Layer w120: 12V_Buck.3 2647.13,2574.13 2757,2684 3571,2684 ; v4(3782,2467) 3787,2467 v4@3787.5,2467.5 ; 3571,2684 v4@3787.5,2467.5 ; 3571,2684 v4@3787.5,2467.5 ; 3571,2684 v4@3787.5,2467.5
Button_1: Arduino_Mega.41 Display.6 | length 1980.6
  Top Layer w10: Display.6 2673.72,6575 2628.66,6529.94 2581.94,6529.94 2407,6355 2407,6278.71 2500,6185.71 2500,5224 2734,4990 Arduino_Mega.41
Button_2: Arduino_Mega.43 Display.5 | length 2029.1
  Top Layer w10: Display.5 2577.5,6575 2382,6379.5 2382,6268.36 2475,6175.36 2475,5151 2736,4890 Arduino_Mega.43
Button_3: Arduino_Mega.45 Display.4 | length 2095.5
  Top Layer w10: Display.4 2510,6556.99 2357,6403.99 2357,6258 2450.5,6164.5 2450.5,5579.61 2450,5579.11 2450,5097 2757,4790 Arduino_Mega.45
  Bottom Layer w10: Display.4@2510,6556.99 Display.4
Buzzer_+: Arduino_Mega.46 Buzzer.1 | length 503.3
  Top Layer w10: Arduino_Mega.46 3155,4925 Buzzer.1 Buzzer.1@3155,5096
Colour_Sensor_Out: Arduino_Mega.26 Colour_Sensor.2 | length 2022.3
  Top Layer w10: Arduino_Mega.26 2927,5697 v1(3181,5697) ; v1(3325,5699) 3838,5699 4007,5868 4007,6204 4006.5,6204.5 4006.5,6206.39 3996.95,6215.95 ; 3996,6216.89 3996,6292 4085,6381 4085,6574.76 Colour_Sensor.2
  Bottom Layer w10: v1(3181,5697) 3321,5697 3322,5696 v1(3325,5699)
Colour_Sensor_S0: Arduino_Mega.24 Colour_Sensor.8 | length 737.6
  Top Layer w10: Arduino_Mega.24 2920,5830.98 3009,5919.98 3009,6380.65 Colour_Sensor.8
Colour_Sensor_S1: Arduino_Mega.22 Colour_Sensor.7 | length 736
  Top Layer w10: Arduino_Mega.22 2989,5959 2989,6459.08 Colour_Sensor.7
Colour_Sensor_S2: Arduino_Mega.28 Colour_Sensor.3 | length 1973.3
  Top Layer w10: Arduino_Mega.28 2923,5590 2988,5655 2991,5658 v1(3202,5658) ; v1(3347,5659) 3395,5659 3406,5670 3837.28,5670 4029.5,5862.22 4029.5,6295.86 4105,6371.36 4105,6496.34 Colour_Sensor.3
  Bottom Layer w10: v1(3202,5658) 3203,5659 v1(3347,5659)
Colour_Sensor_S3: Arduino_Mega.30 Colour_Sensor.4 | length 1941.3
  Top Layer w10: Arduino_Mega.30 3046,5616 3201,5616 3203,5618 v1(3203,5614) ; v1(3367,5614) 3393,5614 3396,5617 3399,5620 3429,5650 3845.57,5650 4049.5,5853.93 4049.5,6281.72 4125,6357.22 4125,6417.91 Colour_Sensor.4
  Bottom Layer w10: v1(3203,5614) 3203,5616 3205,5614 3324,5614 v1(3367,5614)
Colour_Sensor_Vcc: Colour_Sensor.1 CS_Switch.1 | length 224.1
  Top Layer w50: Colour_Sensor.1@4164,6754 4232,6754 4336,6650 CS_Switch.1
Gyro_INT: Arduino_Mega.AD8 Gyro.8 | length 477.2
  Top Layer w10: Arduino_Mega.AD8 3720,3856 Gyro.8@3892,3684
INA_1: Arduino_Mega.10 Dangaya_Logic.6 | length 1021.8
  Top Layer w10: Dangaya_Logic.6 5178,5883 ; 5178,5883 Arduino_Mega.10@5178,5990 ; 5178,5883 Arduino_Mega.10@5178,5992 ; 5178,5883 Arduino_Mega.10@5178,5990 ; 5178,5883 Arduino_Mega.10@5178,5992 ; 5178,5883 Arduino_Mega.10@5178,5990 ; 5178,5883 Arduino_Mega.10@5178,5990 ; 5178,5883 Arduino_Mega.10@5178,5990 ; Arduino_Mega.10@5178,5990 Arduino_Mega.10@5178,5992 ; Arduino_Mega.10@5178,5990 Arduino_Mega.10@5178,5992 ; Arduino_Mega.10@5178,5990 Arduino_Mega.10@5178,5992 ; Arduino_Mega.10@5178,5990 Arduino_Mega.10@5178,5992 ; Arduino_Mega.10@5178,5990 Arduino_Mega.10@5178,5992
INA_2: Arduino_Mega.13 Dangaya_Logic.3 | length 1007.8
  Top Layer w10: Dangaya_Logic.3 5478,5883 ; 5478,5883 Arduino_Mega.13@5478,5990 ; 5478,5883 Arduino_Mega.13@5478,5990 ; 5478,5883 Arduino_Mega.13@5478,5990 ; 5478,5883 Arduino_Mega.13@5478,5990 ; 5478,5883 Arduino_Mega.13@5478,5990 ; 5478,5883 Arduino_Mega.13@5478,5990 ; 5478,5883 Arduino_Mega.13@5478,5990
INB_1: Arduino_Mega.9 Dangaya_Logic.7 | length 1002.2
  Top Layer w10: Dangaya_Logic.7 5079,5884 ; 5079,5884 Arduino_Mega.9@5079,5990 ; 5079,5884 Arduino_Mega.9@5079,5990 ; 5079,5884 Arduino_Mega.9@5079,5990 ; 5079,5884 Arduino_Mega.9@5079,5990 ; 5079,5884 Arduino_Mega.9@5079,5990 ; 5079,5884 Arduino_Mega.9@5079,5990 ; 5079,5884 Arduino_Mega.9@5079,5990
INB_2: Arduino_Mega.12 Dangaya_Logic.4 | length 367.6
  Top Layer w10: Dangaya_Logic.4 5380,5885 Arduino_Mega.12 Arduino_Mega.12@5380,5991
IR_1_Out: Arduino_Mega.49 IR_1.2 | length 1940.3
  Top Layer w10: Arduino_Mega.49 2070,4590 1549,5111 IR_1.2@1169,5111 ; IR_1.2@1156,5124 IR_1.2@1169,5111 ; IR_1.2@1156,5124 IR_1.2@1162.5,5117.5 ; IR_1.2@1156,5124 IR_1.2@1169,5111 ; IR_1.2@1156,5124 IR_1.2@1162.5,5117.5 ; IR_1.2@1162.5,5117.5 IR_1.2@1169,5111 ; IR_1.2@1162.5,5117.5 IR_1.2@1169,5111
IR_2_Out: Arduino_Mega.48 IR_2.2 | length 3482.7
  Top Layer w10: Arduino_Mega.48 2974,4590 3061.14,4502.86 ; 3060,4504 3061.14,4502.86 ; v1(3854,4542) 3800,4542 3744,4486 3078,4486 3061.14,4502.86 ; v1(4662,4813) 4703,4813 4770,4746 5493,4746 5578,4831 5773,4831 5853,4911 5853,5034 IR_2.2@5930,5111
  Bottom Layer w10: v1(3854,4542) 3898,4542 3948.22,4491.78 4077.5,4491.78 4108.72,4523 4228.72,4523 4490.72,4785 4628,4785 4656,4813 v1(4662,4813)
IR_3_Out: Arduino_Mega.47 IR_3.2 | length 3619.8
  Top Layer w10: Arduino_Mega.47 2746,4690 2678,4622 2085,4622 857,5850 ; 857,5850 IR_3.2@857,6120 ; 857,5850 IR_3.2@857,6130 ; 857,5850 IR_3.2@857,6130 ; 857,5850 IR_3.2@857,6120 ; IR_3.2@857,6120 IR_3.2@857,6130 ; IR_3.2@857,6120 IR_3.2@857,6130
IR_4_Out: Arduino_Mega.38 IR_4.2 | length 5580.4
  Top Layer w10: Arduino_Mega.38 2982,5152 2982,5523.72 3029.28,5571 v1(3201,5571) ; v1(3329,5571) 3378.28,5571 3434.28,5627 v1(3891,5627) ; v1(4291,5627) 6190,5627 ; 6194,5627 6238,5671 ; IR_4.2@6238,6120 6238,5671 ; 6238,5671 IR_4.2@6238,6124 ; 6238,5671 IR_4.2@6238,6124 ; 6238,5671 IR_4.2@6238,6124
  Bottom Layer w10: v1(3201,5571) v1(3329,5571) ; v1(3891,5627) v1(4291,5627)
LED_1: Arduino_Mega.31 Display.7 | length 2180.2
  Top Layer w10: Arduino_Mega.31 2685,5490 2625,5550 2625,6074 2893,6342 2893,6529 2922,6558 2922,6648 2878,6692 2776,6692 2712,6756 ; 2712,6756 Display.7@2712,6835.63 ; 2712,6756 Display.7@2712,6837 ; 2712,6756 Display.7@2712,6837 ; 2712,6756 Display.7@2712,6835.63 ; 2712,6756 Display.7@2712,6837 ; 2712,6756 Display.7@2712,6835.63 ; Display.7@2712,6835.63 Display.7@2712,6837 ; Display.7@2712,6835.63 Display.7@2712,6837
LED_2: Arduino_Mega.33 Display.8 | length 2270
  Top Layer w10: Display.8@2613,6828 Display.8@2613,6835 ; Arduino_Mega.33 2745,5390 2600,5535 2600,6084.36 2868,6352.36 2868,6564.85 2737.85,6695 2650,6695 2611,6734 ; 2611,6734 Display.8@2611,6835.63 ; 2611,6734 Display.8@2611,6837 ; 2611,6734 Display.8@2611,6837 ; 2611,6734 Display.8@2611,6837 ; 2611,6734 Display.8@2611,6835.63 ; Display.8@2611,6835.63 Display.8@2611,6837 ; Display.8@2611,6835.63 Display.8@2611,6837
LED_3: Arduino_Mega.35 Display.9 | length 2035.8
  Top Layer w10: Display.9 2510,6743 2578,6675 2729.57,6675 2843,6561.57 2843,6362.71 2575,6094.71 2575,5448 2733,5290 Arduino_Mega.35
LED_4: Arduino_Mega.37 Display.10 | length 2179
  Top Layer w10: Display.10 2410,6807.64 2567.64,6650 2726.28,6650 2818,6558.28 2818,6373.07 2550,6105.07 2550,5377 2737,5190 Arduino_Mega.37
LED_5: Arduino_Mega.39 Display.11 | length 2347.2
  Top Layer w10: Display.11 2520.63,6625 2723,6625 2793,6555 2793,6383.42 2525,6115.42 2525,5300 2735,5090 Arduino_Mega.39
Motor_1_A: Dangaya_Motors.3 Motor_1.1 | length 1088.5
  Top Layer w50: Dangaya_Motors.3@3484,2246 3484,1917 3601,1800 Motor_1.1
Motor_1_B: Dangaya_Motors.4 Motor_1.2 | length 931.2
  Top Layer w50: Dangaya_Motors.4@3583,2252 Dangaya_Motors.4 3585,1954 3639,1900 Motor_1.2
Motor_1_Enc_N: Arduino_Mega.2 Motor_1.6 | length 4069.8
  Top Layer w10: Motor_1.6 4231,2336 4231,3604 3835,4000 3835,4199.36 4170.5,4534.86 4170.5,5840.5 Arduino_Mega.2
Motor_1_Enc_P: Arduino_Mega.3 Motor_1.5 | length 4211.3
  Top Layer w10: Motor_1.5 4256,2261 4256,3599 4256,3618.36 3860,4014.36 3860,4189 4195.5,4524.5 4195.5,5765.5 Arduino_Mega.3
Motor_1_PWM: Arduino_Mega.8 Dangaya_Logic.8 | length 365
  Top Layer w10: Dangaya_Logic.8 4981,5886 Arduino_Mega.8@4981,5988
Motor_2_A: Dangaya_Motors.1 Motor_2.2 | length 685.9
  Top Layer w50: Motor_2.2 3225,1905 3285,1965 Dangaya_Motors.1
Motor_2_B: Dangaya_Motors.2 Motor_2.1 | length 864.2
  Top Layer w50: Motor_2.1 3288,1805 3385,1902 Dangaya_Motors.2
Motor_2_Enc_N: Arduino_Mega.18 Motor_2.6 | length 5798.3
  Top Layer w10: Motor_2.6 2818,2396 2818,2525 2860,2567 4116.36,2567 4206,2656.64 4206,3582 3810,3978 3810,4209.71 4145.5,4545.21 4145.5,5592 4024.5,5713 v1(4022,5713)
  Bottom Layer w10: Arduino_Mega.18 3520,5874 3548,5846 3891.5,5846 4022,5715.5 v1(4022,5713)
Motor_2_Enc_P: Arduino_Mega.19 Motor_2.5 | length 6035.6
  Top Layer w10: Motor_2.5 2793,2321 2793,2535.36 2849.64,2592 4106,2592 4181,2667 4181,3566.64 3785,3962.64 3785,4220.07 4120.5,4555.57 4120.5,5567.5 v1(3974,5714)
  Bottom Layer w10: v1(3974,5714) 3867,5821 3537.64,5821 3418,5940.64 ; 3418,5940.64 Arduino_Mega.19@3418,5992 ; 3418,5940.64 Arduino_Mega.19@3418,5992 ; 3418,5940.64 Arduino_Mega.19@3418,5992
Motor_2_PWM: Arduino_Mega.11 Dangaya_Logic.5 | length 367.6
  Top Layer w10: Dangaya_Logic.5 5280,5885 Arduino_Mega.11 Arduino_Mega.11@5280,5991
NetBluetooth_5: Bluetooth.5 R1.1 R2.2 | length 703.6
  Top Layer w10: Bluetooth.5 1897,7275 1874,7298 1874,7401 1896,7423 2171,7423 2195,7447 R2.2 R1.1
NRF_CE: Arduino_Mega.6 NRF.3 | length 1862.4
  Top Layer w10: v1(4613,5366) 4672,5307 4703.72,5307 5130.72,4880 NRF.3 ; v1(4613,5679) 4614,5680 4614,5881 4720,5987 Arduino_Mega.6
  Bottom Layer w10: v1(4613,5366) v1(4613,5679)
NRF_CSN: Arduino_Mega.7 NRF.4 | length 1936.2
  Top Layer w10: v1(4673,5366) 5112,4927 5618.94,4927 5665.94,4880 NRF.4 ; v1(4673,5679) 4672,5680 4672,5870 4792,5990 Arduino_Mega.7
  Bottom Layer w10: v1(4673,5366) v1(4673,5679)
NRF_GND: Arduino_Mega.GND3 NRF.1 | length 1019.7
  Top Layer w20: Arduino_Mega.GND3@5580,5989 5580,5903 5605.75,5877.25 v1(5605.75,5683.75) ; NRF.1 v1(5605.75,5383.25)
  Bottom Layer w20: v1(5605.75,5383.25) v1(5605.75,5683.75)
NRF_MISO: Arduino_Mega.50 NRF.7 | length 2877.1
  Top Layer w10: Arduino_Mega.50 2992,4490 ; 2993,4490 3017,4466 3795,4466 3823,4494 v1(3852,4494) ; v1(4661,4765) 4705,4765 4744,4726 5566,4726 NRF.7@5611,4681
  Bottom Layer w10: v1@3853,4495 3882,4495 3906,4471 4085,4471 4117,4503 4237,4503 4499,4765 v1(4661,4765)
NRF_MOIS: Arduino_Mega.51 NRF.6 | length 3556
  Top Layer w10: Arduino_Mega.51 2867,4443 2867,4365 2893,4339 2947,4339 3024,4416 3033,4425 3077,4425 ; 3079,4425 3766,4425 3814,4377 v1(3850,4377) ; v1(4661,4645) 4734,4645 4774,4685 5461,4685 5570,4576 5722,4576 5754,4608 5754,4730 NRF.6@5704,4780
  Bottom Layer w10: v1(3850,4377) 3898,4377 3944,4423 4092,4423 4092.5,4423.5 4094.07,4423.5 ; 4099.93,4429.36 4094.07,4423.5 ; v1(4661,4645) 4661,4657 4593,4725 4515.57,4725 4253.57,4463 4133.57,4463 4094.07,4423.5
NRF_SCK: Arduino_Mega.52 NRF.5 | length 3144.6
  Top Layer w10: Arduino_Mega.52 2969.72,4390 3024.72,4445 3849,4445 v1(3850,4446) ; v1(4661,4705) 5469.28,4705 5578.28,4596 5638,4596 5656,4614 5656,4730 NRF.5@5603,4783
  Bottom Layer w10: v1@3849,4445 v1(3850,4446) 3874.61,4446 4088.28,4446 4125.28,4483 4245.28,4483 4507.28,4745 4621,4745 v1(4661,4705)
NRF_Vcc: Arduino_Mega.3V3 NRF.2 | length 1450.9
  Bottom Layer w20: Arduino_Mega.3V3 5220,5003 5275,5058 5639,5058 NRF.2@5707,4990
Raykha_S12_N: Arduino_Mega.AD1 Reykha_IR_Panel.15 | length 7661.6
  Top Layer w10: Reykha_IR_Panel.15 4155,7145 5154.36,7145 5389.2,7379.84 6009.12,7379.84 6576,6812.96 6576,5721.87 6302.13,5448 4422.64,5448 4368,5393.36 4368,4301.36 4445,4224.36 4445,4224 4520,4149 Arduino_Mega.AD1 Arduino_Mega.AD1@4520,4089
Raykha_S12_P: Arduino_Mega.AD0 Reykha_IR_Panel.17 | length 7524.5
  Top Layer w10: Reykha_IR_Panel.17 4330,7170 5144,7170 5378.84,7404.84 6019.47,7404.84 6601,6823.32 6601,5711.51 6312.49,5423 4433,5423 4393,5383 4393,4314 4617,4090 Arduino_Mega.AD0
Raykha_S34_N: Arduino_Mega.AD3 Reykha_IR_Panel.11 | length 7972.8
  Top Layer w10: Reykha_IR_Panel.11 3806,7094 5175.48,7094 5411.32,7329.84 5986.99,7329.84 6525,6791.84 6525,5741.58 6282.42,5499 4401.52,5499 4318,5415.48 4318,4280.64 4364,4234.64 4364,4134 Arduino_Mega.AD3
Raykha_S34_P: Arduino_Mega.AD2 Reykha_IR_Panel.13 | length 7798.5
  Top Layer w10: Reykha_IR_Panel.13 3981,7119 5165.13,7119 5400.97,7354.84 5997.35,7354.84 6550,6802.19 6550,5731.22 6292.78,5474 4411.88,5474 4343,5405.13 4343,4291 4420,4214 Arduino_Mega.AD2
Raykha_S56_N: Arduino_Mega.AD5 Reykha_IR_Panel.7 | length 8334.7
  Top Layer w10: Reykha_IR_Panel.7 3456,7044 5196.19,7044 5432.03,7279.84 5966.28,7279.84 6475,6771.13 6475,5762.29 6261.71,5549 4380.81,5549 4268,5436.19 4268,4345 4120,4197 Arduino_Mega.AD5
Raykha_S56_P: Arduino_Mega.AD4 Reykha_IR_Panel.9 | length 8135.5
  Top Layer w10: Reykha_IR_Panel.9 3631,7069 5185.84,7069 5421.68,7304.84 5976.64,7304.84 6500,6781.48 6500,5751.93 6272.07,5524 4391.16,5524 4293,5425.84 4293,4314 4219,4240 4219,4091 Arduino_Mega.AD4
Raykha_S78_N: Arduino_Mega.AD7 Reykha_IR_Panel.3 | length 8734.7
  Top Layer w10: Reykha_IR_Panel.3 3107,6993 5217.32,6993 5454.16,7229.84 5944.16,7229.84 6424,6750 6424,5782 6242,5600 4359.68,5600 4218,5458.32 4218,4388 Arduino_Mega.AD7
Raykha_S78_P: Arduino_Mega.AD6 Reykha_IR_Panel.5 | length 8534.7
  Top Layer w10: Reykha_IR_Panel.5 3282,7018 5206.96,7018 5443.8,7254.84 5954.51,7254.84 6449,6760.36 6449,5771.64 6252.36,5575 4370.04,5575 4243,5447.96 4243,4367 4020,4144 Arduino_Mega.AD6
Raykha_Vcc: Reykha_IR_Panel.1 Reykha_Switch.1 | length 458.6
  Bottom Layer w50: Reykha_IR_Panel.1 2680,7016 Reykha_Switch.1@2860,6836
SCL_SDA_N: Arduino_Mega.20 Arduino_Mega.SDA Display.3 Gyro.4 Servo_Driver.3 ToF_1.4 ToF_2.4 ToF_3.4 ToF_4.4 | length 14047.6
  Top Layer w10: ToF_4.4 1444.48,6523 1930,6523 2078,6671 2314,6671 Display.3 ; v1(3285,4564) 3285,4568.5 3282.5,4571 3282.5,5952.5 Arduino_Mega.20 Arduino_Mega.20@3320,6010.36 ; v1@3287.5,4340.57 v1(3287.5,4348) 3282.5,4343 3282.5,4202 3369,4115.5 3369,4017 3341,3989 3341,3834 Gyro.4 ; Servo_Driver.3 5477,6792 5802.52,6792 ToF_3.4@5803,6792 ; Arduino_Mega.SDA 5882,6092 5882,6740 5832,6790 ToF_3.4
  Bottom Layer w10: ToF_2.4@2253,8132 2253,8221.36 2365.64,8334 4529.74,8334 ToF_1.4 4735,8077 4776,8036 5362,8036 5903,7495 5903,6890.48 ToF_3.4 ; Display.3 2492,6493 2729.36,6493 3076.36,6146 3186.36,6146 3320,6012.36 Arduino_Mega.20@3320,5993 ; v1(3285,4564) 3285,4350.5 v1(3287.5,4348)
  Bottom Layer w15: Arduino_Mega.20 3748,5562 4316,5562 4578,5824 4585.32,5831.32 5713.97,5831.32 5780,5897.36 Arduino_Mega.SDA
SCL_SDA_P: Arduino_Mega.21 Arduino_Mega.SCL Display.2 Gyro.3 Servo_Driver.2 ToF_1.5 ToF_2.5 ToF_3.5 ToF_4.5 | length 14011
  Top Layer w10: ToF_4.5 1369.48,6498 1940.36,6498 2088.36,6646 2239,6646 Display.2 ; ToF_2.5@2155,8127 2155.87,8127.87 2213,8185 2289,8185 v1(2355,8251) ; Arduino_Mega.21 3257.5,5952.5 3257.5,4571 3227,4540.5 v1(3227,4537) ; v1(3222,4351) 3222,4347 3257.5,4311.5 3257.5,4191.64 3272,4177.14 3272,4020 3316,3976 3316,3759 Gyro.3 ; Servo_Driver.2 5474,6889 5802.52,6889 ToF_3.5@5803.52,6889 ; ToF_3.5 ToF_3.5@5803.52,6889 ; Arduino_Mega.SCL 5907,6017 5907,6785.52 ToF_3.5@5803.52,6889
  Bottom Layer w10: Display.2 2417,6468 2719,6468 3066,6121 3176,6121 3219,6078 Arduino_Mega.21@3219,5992 ; v1(2355,8251) 2355,8288 2376,8309 4454.74,8309 ToF_1.5 4752.74,8011 5351.64,8011 5878,7484.64 5878,6965.48 ToF_3.5 ; v1(3222,4351) 3222,4535.5 3223.5,4537 v1(3227,4537)
  Bottom Layer w15: Arduino_Mega.21 3673,5537 4326.36,5537 4595.68,5806.32 5724.32,5806.32 5880,5962 Arduino_Mega.SCL
XSHUT_1: Arduino_Mega.23 ToF_1.2 | length 4706.4
  Top Layer w10: Arduino_Mega.23 2699,5890 2665,5924 2665,6057.43 2933,6325.43 2933,6512.43 2962,6541.43 v1(2962,7008) ; v1(3027,7292) 3684,7949 4756,7949 ; 4756,7949 ToF_1.2@4935.37,8128.37 ; 4756,7949 ToF_1.2@4936,8129 ; 4756,7949 ToF_1.2@4936,8129 ; 4756,7949 ToF_1.2@4935.37,8128.37 ; ToF_1.2@4935.37,8128.37 ToF_1.2@4936,8129 ; ToF_1.2@4935.37,8128.37 ToF_1.2@4936,8129
  Bottom Layer w10: v1(2962,7008) 2962,7102 3027,7167 v1(3027,7292)
XSHUT_2: Arduino_Mega.25 ToF_2.2 | length 2828.4
  Top Layer w10: ToF_2.2@2455,8129 ToF_2.2 2455,8117 2830,7742 2835,7737 v1(2835,7344) ; Arduino_Mega.25 2696,5790 2645,5841 2645,6065.72 2913,6333.72 2913,6520.72 2942,6549.72 2942,6904 2913,6933 v1(2913,7072)
  Bottom Layer w10: v1@2836,7349 2836,7346 2931,7251 2931,7182 2913,7164 v1(2913,7072)
XSHUT_3: Arduino_Mega.27 ToF_3.2 | length 3677.3
  Top Layer w10: Arduino_Mega.27 2876,5746 v1(3202,5746) ; v1(3320,5746) 3343,5723 3833.72,5723 3979,5868.28 v1(3979,6195) ; v1(4093,6195) 4093,6296.93 4447.07,6651 5740,6651 5801.76,6589.24 ToF_3.2@5803,6588
  Bottom Layer w10: v1(3202,5746) v1(3320,5746) ; v1(3979,6195) v1(4093,6195)
XSHUT_4: Arduino_Mega.29 ToF_4.2 | length 3131.3
  Top Layer w10: v1(1394,6465) 2112,6465 2423,6154 v1(2423,5591) ; v1(1394,6635) 1394,6776 ; ToF_4.2@1288.74,6881.26 1288,6882 ToF_4.2@1288.74,6881.26 ; ToF_4.2@1288.74,6881.26 1394,6776 ; ToF_4.2@1288.74,6881.26 1394,6776
  Bottom Layer w10: v1(1394,6465) v1(1394,6635) ; Arduino_Mega.29@2820,5591 Arduino_Mega.29@2820.5,5590.5 ; Arduino_Mega.29@2820,5591 v1(2423,5591) Arduino_Mega.29@2820,5591 ; Arduino_Mega.29@2820,5591 Arduino_Mega.29@2820.5,5590.5 ; Arduino_Mega.29@2820.5,5590.5 2822,5589 Arduino_Mega.29@2820.5,5590.5
pads on no net: Arduino_Mega.0 Arduino_Mega.1 Arduino_Mega.4 Arduino_Mega.5 Arduino_Mega.5V_2 Arduino_Mega.5V_3 Arduino_Mega.14 Arduino_Mega.15 Arduino_Mega.32 Arduino_Mega.34 Arduino_Mega.36 Arduino_Mega.40 Arduino_Mega.42 Arduino_Mega.44 Arduino_Mega.53 Arduino_Mega.AD9 Arduino_Mega.AD10 Arduino_Mega.AD11 Arduino_Mega.AD12 Arduino_Mega.AD13 Arduino_Mega.AD14 Arduino_Mega.AD15 Arduino_Mega.AREF Arduino_Mega.IOREF Arduino_Mega.NC Arduino_Mega.RESET Arduino_Switch.3 Bluetooth.1 Bluetooth.6 Colour_Sensor.6 CS_Switch.3 Gyro.5 Gyro.6 Gyro.7 NRF.8 Reykha_IR_Panel.4 Reykha_IR_Panel.6 Reykha_IR_Panel.8 Reykha_IR_Panel.10 Reykha_IR_Panel.12 Reykha_IR_Panel.14 Reykha_IR_Panel.16 Reykha_IR_Panel.18 Reykha_Switch.3 ToF_1.3 ToF_2.3 ToF_3.3 ToF_4.3

## Silkscreen, mask and mechanical layers (free items; w line width, h text height)
Mechanical 13:
  drawing of 1115 lines, arcs and shapes, not listed